# Altium PCB PCB1.PcbDoc (part 1 of 2)
Units mm, origin at the board's own origin, x right, y up, seen from the top; angles counter-clockwise.
Board outline 300 x 200 mm, 2 copper layers (Top Layer, Bottom Layer); 518 components, 359 nets, 1431 pads, 0 vias.
Unrouted connection lines stored in the file: 983.
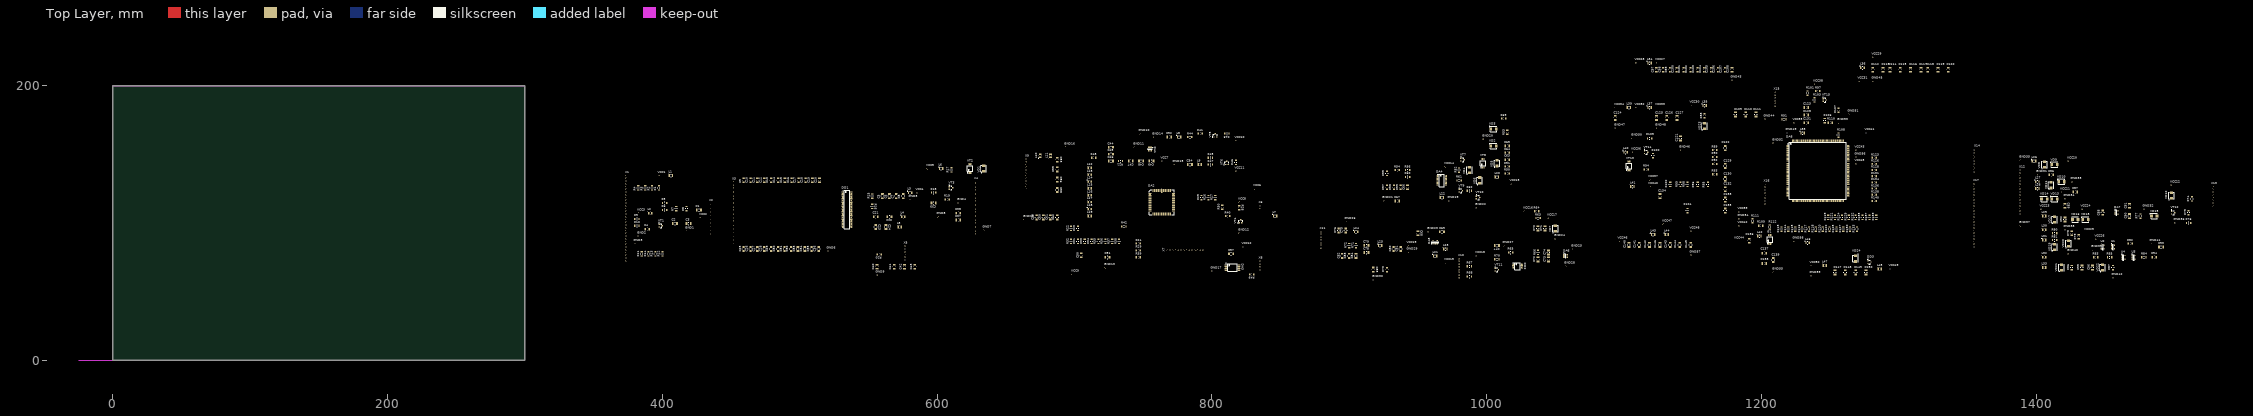
[diagram p0: Top Layer view]
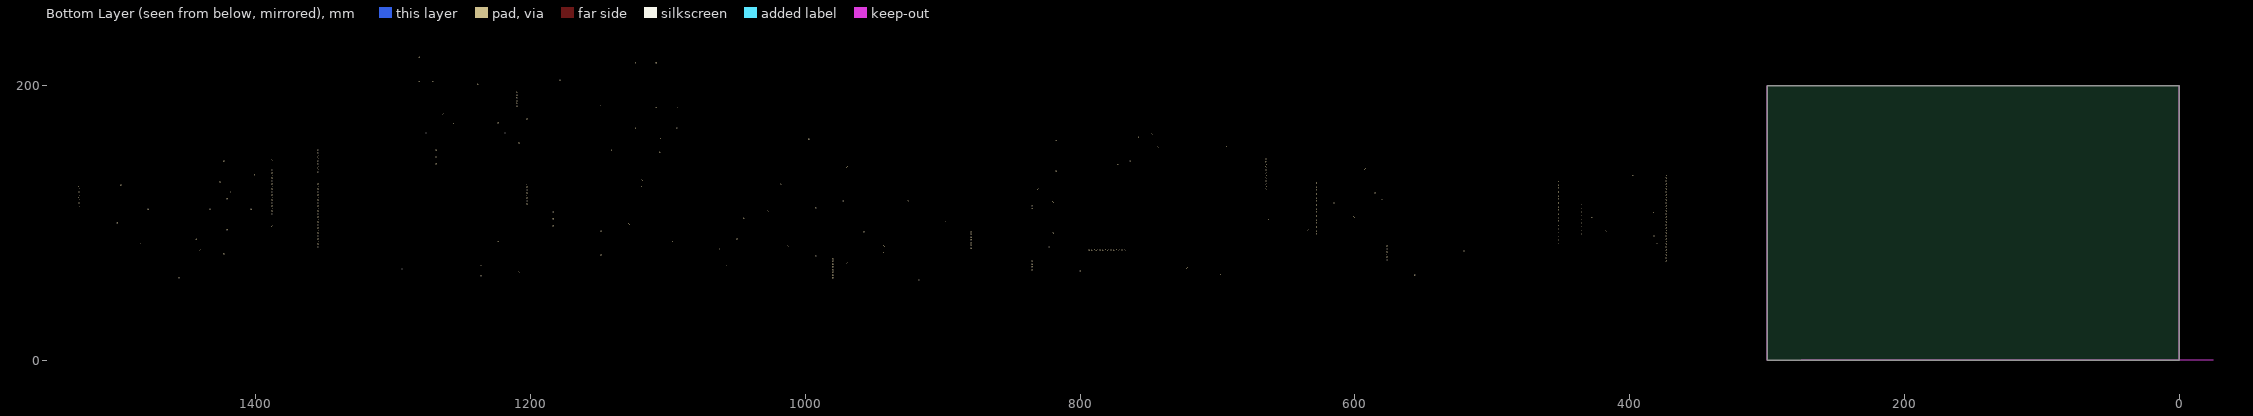
[diagram p1: Bottom Layer view, seen from below]

## Layer stack, top to bottom
Top Solder: solder mask 0.0102, Solder Resist, Dk 3.5
Top Layer: signal copper 0.0356
Dielectric 1: dielectric 0.32, FR-4, Dk 4.8
Bottom Layer: signal copper 0.0356
Bottom Solder: solder mask 0.0102, Solder Resist, Dk 3.5

## Board outline
0,0 300,0 300,200 0,200

## Design rules (kind name [scope] priority, off if disabled: settings)
Clearance [All] p1: gap=0.254 ignorepadtopadclearanceinfootprint=FALSE except(0: Arc-Hole Track-Hole SMDPad-Hole THPad-Hole Via-Hole Fill-Hole Poly-Hole Region-Hole Text-Hole)
PolygonConnect [All] p1: connectstyle=Relief reliefconductorwidth=0.254 reliefentries=4 polygonreliefangle="90 Angle" airgapwidth=0.254
RoomDefinition sch6 [InComponentClass('sch6')] p1: confinementstyle=ConfineIn formatcopy=TRUE lockcomponents=FALSE outline 1386,58 1533.5,58 1533.5,148 1386,148
RoomDefinition sch5_1 [InComponentClass('sch5_1')] p2: confinementstyle=ConfineIn formatcopy=TRUE lockcomponents=FALSE outline 1091.15,56.5 1361.15,56.5 1361.15,224 1091.15,224
RoomDefinition sch4 [InComponentClass('sch4')] p3: confinementstyle=ConfineIn formatcopy=TRUE lockcomponents=FALSE outline 877.5,56 1065,56 1065,181 877.5,181
RoomDefinition sch3 [InComponentClass('sch3')] p4: confinementstyle=ConfineIn formatcopy=TRUE lockcomponents=FALSE outline 661,57.5 851,57.5 851,182.5 661,182.5
RoomDefinition sch2 [InComponentClass('sch2')] p5: confinementstyle=ConfineIn formatcopy=TRUE lockcomponents=FALSE outline 447.8,59.55 640.3,59.55 640.3,157.55 447.8,157.55
RoomDefinition sch1 [InComponentClass('sch1')] p6: confinementstyle=ConfineIn formatcopy=TRUE lockcomponents=FALSE outline 371.25,70 437.5,70 437.5,140 371.25,140
RoutingVias [All] p1: holewidth=0.711 width=1.27 viastyle="Through Hole" minholewidth=0.711 minwidth=1.27 maxholewidth=0.711 maxwidth=1.27
SolderMaskExpansion [All] p1: expansion=0.102
Width [All] p1: maxlimit=0.254 minlimit=0.254 preferedwidth=0.254
30 further rules are at their usual default settings.

## Classes and differential pairs
component class sch1: C1 C2 C3 C4 GND1 GND2 GND3 L1 L2 R1 R2 R3 R4 R5 R6 R7 R8 R9 R10 R11 R12 R13 R14 VCC1 VCC2 VCC3 VT1 X1 X2
component class sch2: C5 C6 C7 C8 C9 C10 C11 C12 C13 C14 C15 C16 C17 C18 C19 C20 C21 C22 C23 C24 C25 C26 C27 C28 C29 C30 C31 C32 C33 C34 C35 C36 C37 C38 C39 C40 C41 C42 C43 DD1 GND4 GND5 GND6 GND7 GND8 GND9 L3 L4 L5 L6 R15 R16 R17 R18 R19 R20 VCC4 VCC5 VD1 VT2 VT3 X3 X4 X5
component class sch3: C44 C45 C46 C47 C48 C49 C50 C51 C52 C53 C54 C55 C56 C57 C58 C59 C60 C61 C62 DA1 DA2 DA3 GND10 GND11 GND12 GND13 GND14 GND15 GND16 GND17 GND18 L7 L8 L9 L10 L11 L12 L13 L14 L15 L16 L17 L18 L19 R21 R22 R23 R24 R25 R26 R27 R28 R29 R30 R31 R32 R33 R34 R35 R36 R37 R38 R39 R40 R41 R42 R43 R44 R45 R46 R47 R48 R49 VCC6 VCC7 VCC8 VCC9 VCC10 VCC11 VCC12 VT4 VT5 VT6 X6 X7 X8 X9
component class sch4: C63 C64 C65 C66 C67 C68 C69 C70 C71 C72 C73 C74 C75 C76 C77 C78 C79 C80 C81 C82 C83 C84 C85 DA4 DA5 DA6 DD2 GND19 GND20 GND21 GND22 GND23 GND24 GND25 GND26 GND27 GND28 GND29 GND30 L20 L21 L22 L23 L24 L25 R50 R51 R52 R53 R54 R55 R56 R57 R58 R59 R60 R61 R62 R63 R64 R65 R66 R67 R68 R69 R70 R71 R72 R73 VCC13 VCC14 VCC15 VCC16 VCC17 VCC18 VCC19 VD2 VD3 VD4 VD5 VD6 VD7 VT7 VT8 VT9 VT10 VT11 X10 X11
component class sch5_1: C97 C98 C99 C100 C101 C102 C103 C104 C105 C106 C107 C108 C109 C110 C111 C112 C113 C114 C115 C116 C117 C118 C119 C120 C121 C122 C123 C124 C125 C126 C127 C128 C129 C130 C131 C132 C133 C134 C135 C136 C137 C138 C139 C140 C141 C142 C143 C144 C145 C146 C147 C148 C149 C150 DA8 DD3 G1 GND43 GND44 GND45 GND46 GND47 GND48 GND49 GND50 GND51 GND52 GND53 GND54 GND55 GND56 GND57 GND58 GND59 L34 L35 L36 L37 L38 L39 L40 L41 L42 L43 L44 L45 L46 L47 R88 R89 R90 R91 R92 R93 R94 R95 R96 R97 R98 R99 R100 R101 R102 R103 R104 R105 R106 R107 R108 R109 R110 R111 R112 R113 R114 R115 R116 R117 R118 R119 R120 R121 R122 R123 R124 R125 R126 R127 R128 R129 R130 R131 R132 R133 R134 R135 R136 R137 R138 R139 R140 VCC27 VCC28 VCC29 VCC30 VCC31 VCC32 VCC33 VCC34 VCC35 VCC36 VCC37 VCC38 VCC39 VCC40 VCC41 VCC42 VCC43 VCC44 VCC45 VCC46 VCC47 VCC48 VCC49 VCC50 VD23 VD24 VT13 VT14 VT15 X14 X15 X16 X17
component class sch6: C86 C87 C88 C89 C90 C91 C92 C93 C94 C95 C96 DA7 GND31 GND32 GND33 GND34 GND35 GND36 GND37 GND38 GND39 GND40 GND41 GND42 L26 L27 L28 L29 L30 L31 L32 L33 R74 R75 R76 R77 R78 R79 R80 R81 R82 R83 R84 R85 R86 R87 U1 U2 U3 U4 VCC20 VCC21 VCC22 VCC23 VCC24 VCC25 VCC26 VD8 VD9 VD10 VD11 VD12 VD13 VD14 VD15 VD16 VD17 VD18 VD19 VD20 VD21 VD22 VT12 X12 X13

## Components (designator, comment, footprint, x,y, rotation, side; value= is the part's Value field where it differs from the comment)
C1 "*" "Capacitor 0805" 426.6,109.5 r0 top
C2 "*" "Capacitor 0805" 409.1,99.5 r0 top
C3 "*" "Capacitor 0805" 419.1,99.5 r0 top
C4 "*" "Capacitor 0805" 389,95.45 r0 top
C5 "*" "Capacitor 0805" 560.3,119.55 r90 top
C6 "*" "Capacitor 0805" 565.3,119.55 r90 top
C7 "*" "Capacitor 0805" 570.3,119.55 r90 top
C8 "*" "Capacitor 0805" 575.3,119.55 r90 top
C9 "*" "Capacitor 0805" 459.3,131.05 r90 top
C10 "*" "Capacitor 0805" 464.3,131.05 r90 top
C11 "*" "Capacitor 0805" 469.3,131.05 r90 top
C12 "*" "Capacitor 0805" 474.3,131.05 r90 top
C13 "*" "Capacitor 0805" 479.3,131.05 r90 top
C14 "*" "Capacitor 0805" 484.3,131.05 r90 top
C15 "*" "Capacitor 0805" 489.3,131.05 r90 top
C16 "*" "Capacitor 0805" 494.3,131.05 r90 top
C17 "*" "Capacitor 0805" 499.3,131.05 r90 top
C18 "*" "Capacitor 0805" 504.3,131.05 r90 top
C19 "*" "Capacitor 0805" 509.3,131.05 r90 top
C20 "*" "Capacitor 0805" 514.3,131.05 r90 top
C21 "*" "Capacitor 0805" 555.3,104.55 r0 top
C22 "*" "Capacitor 0805" 565.3,104.55 r180 top
C23 "*" "Capacitor 0805" 555.3,97.05 r270 top
C24 "*" "Capacitor 0805" 562.8,97.05 r270 top
C25 "*" "Capacitor 0805" 459.3,81.05 r90 top
C26 "*" "Capacitor 0805" 464.3,81.05 r90 top
C27 "*" "Capacitor 0805" 469.3,81.05 r90 top
C28 "*" "Capacitor 0805" 474.3,81.05 r90 top
C29 "*" "Capacitor 0805" 479.3,81.05 r90 top
C30 "*" "Capacitor 0805" 484.3,81.05 r90 top
C31 "*" "Capacitor 0805" 489.3,81.05 r90 top
C32 "*" "Capacitor 0805" 493.8,81.05 r90 top
C33 "*" "Capacitor 0805" 498.8,81.05 r90 top
C34 "*" "Capacitor 0805" 503.8,81.05 r90 top
C35 "*" "Capacitor 0805" 508.8,81.05 r90 top
C36 "*" "Capacitor 0805" 513.8,81.05 r90 top
C37 "*" "Capacitor 0805" 615.427,102.05 r0 top
C38 "*" "Capacitor 0805" 615.427,107.05 r0 top
C39 "*" "Capacitor 0805" 597.427,114.55 r180 top
C40 "*" "Capacitor 0805" 556.3,68.05 r90 top
C41 "*" "Capacitor 0805" 568.8,68.05 r90 top
C42 "*" "Capacitor 0805" 576.3,68.05 r90 top
C43 "*" "Capacitor 0805" 583.8,68.05 r90 top
C44 "*" "Capacitor 0805" 726.5,155 r0 top
C45 "*" "Capacitor 0805" 726.5,150 r0 top
C46 "*" "Capacitor 0805" 726.5,145 r0 top
C47 "*" "Capacitor 0805" 741,145 r180 top
C48 "*" "Capacitor 0805" 748.5,145 r180 top
C49 "*" "Capacitor 0805" 756,145 r180 top
C50 "*" "Capacitor 0805" 705,76.5 r90 top
C51 "*" "Capacitor 0805" 724,75 r0 top
C52 "*" "Capacitor 0805" 769,162.5 r0 top
C53 "*" "Capacitor 0805" 687.5,146 r270 top
C54 "*" "Capacitor 0805" 784,142.5 r0 top
C55 "*" "Capacitor 0805" 687.5,139 r90 top
C56 "*" "Capacitor 0805" 687.5,131.5 r270 top
C57 "*" "Capacitor 0805" 814,77.5 r0 top
C58 "*" "Capacitor 0805" 687.5,124 r270 top
C59 "*" "Capacitor 0805" 672.5,104 r90 top
C60 "*" "Capacitor 0805" 677.5,104 r90 top
C61 "*" "Capacitor 0805" 682.5,104 r90 top
C62 "*" "Capacitor 0805" 687.5,104 r90 top
C63 "*" "Capacitor 0805" 1015,146 r0 top
C64 "*" "Capacitor 0805" 1015,151 r0 top
C65 "*" "Capacitor 0805" 1015,156 r0 top
C66 "*" "Capacitor 0805" 942.5,126 r90 top
C67 "*" "Capacitor 0805" 935,116 r0 top
C68 "*" "Capacitor 0805" 950,92.5 r270 top
C69 "*" "Capacitor 0805" 967.5,93.5 r0 top
C70 "*" "Capacitor 0805" 1037.5,96 r90 top
C71 "*" "Capacitor 0805" 1042.5,96 r90 top
C72 "*" "Capacitor 0805" 1037.5,73.5 r90 top
C73 "*" "Capacitor 0805" 1045,73.5 r90 top
C74 "*" "Capacitor 0805" 1045,78.5 r90 top
C75 "*" "Capacitor 0805" 897.5,94.5 r90 top (schematic designator C76)
C76 "*" "Capacitor 0805" 892.5,94.5 r90 top (schematic designator C77)
C77 "*" "Capacitor 0805" 1007.5,83.5 r180 top (schematic designator C75)
C78 "*" "Capacitor 0805" 912.5,78.5 r0 top
C79 "*" "Capacitor 0805" 912.5,83.5 r0 top
C80 "*" "Capacitor 0805" 932.5,81 r90 top
C81 "*" "Capacitor 0805" 937.5,81 r90 top
C82 "*" "Capacitor 0805" 895,76 r90 top
C83 "*" "Capacitor 0805" 900,76 r90 top
C84 "*" "Capacitor 0805" 905,76 r90 top
C85 "*" "Capacitor 0805" 917.5,66 r270 top
C86 "*" "Capacitor 0805" 1411,135 r0 top
C87 "*" "Capacitor 0805" 1428.5,122.5 r0 top
C88 "*" "Capacitor 0805" 1448.5,107.5 r90 top
C89 "*" "Capacitor 0805" 1421,112.5 r270 top
C90 "*" "Capacitor 0805" 1468,105 r90 top
C91 "*" "Capacitor 0805" 1468,112.5 r90 top
C92 "*" "Capacitor 0805" 1421,102.5 r90 top
C93 "*" "Capacitor 0805" 1491,82.5 r0 top
C94 "*" "Capacitor 0805" 1486,75 r0 top
C95 "*" "Capacitor 0805" 1433.5,67.5 r90 top
C96 "*" "Capacitor 0805" 1441,67.5 r90 top
C97 "*" "Capacitor 0805" 1123.65,211.5 r90 top
C98 "*" "Capacitor 0805" 1128.65,211.5 r90 top
C99 "*" "Capacitor 0805" 1133.65,211.5 r90 top
C100 "*" "Capacitor 0805" 1138.65,211.5 r90 top
C101 "*" "Capacitor 0805" 1143.65,211.5 r90 top
C102 "*" "Capacitor 0805" 1148.65,211.5 r90 top
C103 "*" "Capacitor 0805" 1153.65,211.5 r90 top
C104 "*" "Capacitor 0805" 1158.65,211.5 r90 top
C105 "*" "Capacitor 0805" 1163.65,211.5 r90 top
C106 "*" "Capacitor 0805" 1168.65,211.5 r90 top
C107 "*" "Capacitor 0805" 1173.65,211.5 r90 top
C108 "*" "Capacitor 0805" 1178.65,211.5 r90 top
C109 "*" "Capacitor 0805" 1181.15,179 r90 top
C110 "*" "Capacitor 0805" 1188.65,179 r90 top
C111 "*" "Capacitor 0805" 1196.15,179 r90 top
C112 "*" "Capacitor 0805" 1281.15,211.5 r90 top
C113 "*" "Capacitor 0805" 1288.65,211.5 r90 top
C114 "*" "Capacitor 0805" 1293.65,211.5 r90 top
C115 "*" "Capacitor 0805" 1301.15,211.5 r90 top
C116 "*" "Capacitor 0805" 1308.65,211.5 r90 top
C117 "*" "Capacitor 0805" 1316.15,211.5 r90 top
C118 "*" "Capacitor 0805" 1321.15,211.5 r90 top
C119 "*" "Capacitor 0805" 1328.65,211.5 r90 top
C120 "*" "Capacitor 0805" 1336.15,211.5 r90 top
C121 "*" "Capacitor 0805" 1141.15,161.5 r270 top
C122 "*" "Capacitor 0805" 1173.65,154.5 r270 top
C123 "*" "Capacitor 0805" 1232.65,184 r180 top
C124 "*" "Capacitor 0805" 1093.65,176.5 r90 top
C125 "*" "Capacitor 0805" 1123.65,176.5 r90 top
C126 "*" "Capacitor 0805" 1131.15,176.5 r90 top
C127 "*" "Capacitor 0805" 1138.65,176.5 r90 top
C128 "*" "Capacitor 0805" 1232.65,178.5 r0 top
C129 "*" "Capacitor 0805" 1173.65,141.5 r90 top
C130 "*" "Capacitor 0805" 1173.65,132 r90 top
C131 "*" "Capacitor 0805" 1232.65,173 r0 top
C132 "*" "Capacitor 0805" 1173.65,124.5 r90 top
C133 "*" "Capacitor 0805" 1173.65,117 r90 top
C134 "*" "Capacitor 0805" 1126.15,119.5 r90 top
C135 "*" "Capacitor 0805" 1173.65,109 r270 top
C136 "*" "Capacitor 0805" 1191.15,87 r270 top
C137 "*" "Capacitor 0805" 1202.15,78 r180 top
C138 "*" "Capacitor 0805" 1202.15,70.5 r180 top
C139 "*" "Capacitor 0805" 1208.65,73 r90 top
C140 "*" "Capacitor 0805" 1103.65,84 r90 top
C141 "*" "Capacitor 0805" 1111.15,84 r90 top
C142 "*" "Capacitor 0805" 1118.65,84 r90 top
C143 "*" "Capacitor 0805" 1133.65,84 r90 top
C144 "*" "Capacitor 0805" 1140.65,84 r90 top
C145 "*" "Capacitor 0805" 1148.65,84 r90 top
C146 "*" "Capacitor 0805" 1126.15,84 r90 top
C147 "*" "Capacitor 0805" 1253.65,64 r90 top
C148 "*" "Capacitor 0805" 1261.15,64 r90 top
C149 "*" "Capacitor 0805" 1268.65,64 r90 top
C150 "*" "Capacitor 0805" 1276.15,64 r90 top
DA1 "*" IC103 755,153.8 r270 top
DA2 "*" NT68 763.5,115 r0 top
DA3 "*" IC102 815,67.5 r0 top
DA4 "*" AP494A 967.5,131 r0 top
DA5 "*" PQ05 962.5,86 r90 top
DA6 "*" IC103 1057.5,76 r0 top
DA7 "*" MIC5205 1458.5,107.5 r0 top
DA8 "*" QFP95P4500X4500X245-160N 1241.15,138 r0 top
DD1 "*" THC63 534.4,109.675 r0 top
DD2 "*" "D FF" 1022.5,68.5 r0 top
DD3 "*" MIC39 1278.65,71.5 r0 top
G1 "*" GENERATOR-25MHZ 1206.15,88 r90 top
GND1 "GND" "ONE PIN" 417.5,93.95 r90 top
GND2 "GND" "ONE PIN" 382.5,90.45 r90 top
GND3 "GND" "ONE PIN" 380.1,85 r90 top
GND4 "GND" "ONE PIN" 615.427,114.55 r90 top
GND5 "GND" "ONE PIN" 580.3,117.05 r90 top
GND6 "GND" "ONE PIN" 520.3,79.55 r90 top
GND7 "GND" "ONE PIN" 633.927,94.55 r90 top
GND8 "GND" "ONE PIN" 600.427,104.55 r90 top
GND9 "GND" "ONE PIN" 556.3,62.05 r90 top
GND10 "GND" "ONE PIN" 747.5,165 r90 top
GND11 "GND" "ONE PIN" 743.5,155 r90 top
GND12 "GND" "ONE PIN" 820,92.5 r90 top
GND13 "GND" "ONE PIN" 722.5,67.5 r90 top
GND14 "GND" "ONE PIN" 757.5,162.5 r90 top
GND15 "GND" "ONE PIN" 772.5,142.5 r90 top
GND16 "GND" "ONE PIN" 693.5,155 r90 top
GND17 "GND" "ONE PIN" 800,65 r90 top
GND18 "GND" "ONE PIN" 663.5,102.5 r90 top
GND19 "GND" "ONE PIN" 972.5,116 r90 top
GND20 "GND" "ONE PIN" 997.5,161 r90 top
GND21 "GND" "ONE PIN" 925,116 r90 top
GND22 "GND" "ONE PIN" 992.5,111 r90 top
GND23 "GND" "ONE PIN" 957.5,93.5 r90 top
GND24 "GND" "ONE PIN" 1050,88.5 r90 top
GND25 "GND" "ONE PIN" 1062.5,81 r90 top
GND26 "GND" "ONE PIN" 897.5,101 r90 top
GND27 "GND" "ONE PIN" 1012.5,83.5 r90 top
GND28 "GND" "ONE PIN" 1057.5,68.5 r90 top
GND29 "GND" "ONE PIN" 942.5,78.5 r90 top
GND30 "GND" "ONE PIN" 917.5,58.5 r90 top
GND31 "AGND" "ONE PIN" 1401,135 r90 top
GND32 "GND" "ONE PIN" 1478.5,110 r90 top
GND33 "AGND" "ONE PIN" 1426,130 r90 top
GND34 "AGND" "ONE PIN" 1421,117.5 r90 top
GND35 "AGND" "ONE PIN" 1388.5,145.5 r90 top
GND36 "GND" "ONE PIN" 1501,100 r90 top
GND37 "GND" "ONE PIN" 1388.5,98 r90 top
GND38 "AGND" "ONE PIN" 1421,95 r90 top
GND39 "AGND" "ONE PIN" 1441,80.5 r90 top
GND40 "GND" "ONE PIN" 1423.5,77.5 r90 top
GND41 "AGND" "ONE PIN" 1483.5,85 r90 top
GND42 "AGND" "ONE PIN" 1456,60 r90 top
GND43 "GND" "ONE PIN" 1178.65,204 r90 top
GND44 "AGND" "ONE PIN" 1202.5,175.5 r90 top
GND45 "GND" "ONE PIN" 1281.15,203 r90 top
GND46 "GND" "ONE PIN" 1141.15,153 r90 top
GND47 "GND" "ONE PIN" 1093.65,169 r90 top
GND48 "GND" "ONE PIN" 1123.65,169 r90 top
GND49 "AGND" "ONE PIN" 1218.65,165.5 r90 top
GND50 "GND" "ONE PIN" 1106.15,161.5 r90 top
GND51 "GND" "ONE PIN" 1263.65,179 r90 top
GND52 "GND" "ONE PIN" 1208.65,158 r90 top
GND53 "GND" "ONE PIN" 1256.15,173 r90 top
GND54 "GND" "ONE PIN" 1183.65,103 r90 top
GND55 "GND" "ONE PIN" 1208.65,64 r90 top
GND56 "AGND" "ONE PIN" 1268.65,148 r90 top
GND57 "AGND" "ONE PIN" 1148.65,76.5 r90 top
GND58 "GND" "ONE PIN" 1223.65,86.5 r90 top
GND59 "GND" "ONE PIN" 1236.15,61.5 r90 top
L1 "*" "Inductor 2520" 406.25,134.5 r0 top
L2 "*" "Inductor 2520" 391.25,107 r0 top
L3 "*" "Inductor 2520" 580.3,122.05 r0 top
L4 "*" "Inductor 2520" 575.3,104.55 r0 top
L5 "*" "Inductor 2520" 572.8,97.05 r0 top
L6 "*" "Inductor 2520" 602.927,139.55 r0 top
L7 "*" "Inductor 2520" 846,105 r0 top
L8 "*" "Inductor 2520" 776.15,162.5 r0 top
L9 "*" "Inductor 2520" 791.15,142.5 r0 top
L10 "*" "Inductor 2520" 675,148.85 r90 top
L11 "*" "Inductor 2520" 682.5,148.85 r90 top
L12 "*" "Inductor 2520" 711.15,140 r0 top
L13 "*" "Inductor 2520" 711.15,135 r0 top
L14 "*" "Inductor 2520" 711.15,130 r0 top
L15 "*" "Inductor 2520" 711.15,125 r0 top
L16 "*" "Inductor 2520" 711.15,120 r0 top
L17 "*" "Inductor 2520" 711.15,115 r0 top
L18 "*" "Inductor 2520" 711.15,110 r0 top
L19 "*" "Inductor 2520" 711.15,105 r0 top
L20 "*" "Inductor 2520" 1007.5,133.5 r0 top
L21 "*" "Inductor 2520" 962.5,76 r0 top
L22 "*" "Inductor 2520" 967.5,118.5 r0 top
L23 "*" "Inductor 2520" 970,81 r0 top
L24 "*" "Inductor 2520" 905,93.5 r0 top
L25 "*" "Inductor 2520" 922.5,83.5 r0 top
L26 "*" "Inductor 2520" 1398.5,145 r0 top
L27 "*" "Inductor 2520" 1401,130 r0 top
L28 "*" "Inductor 2520" 1401,125 r0 top
L29 "*" "Inductor 2520" 1406,105 r0 top
L30 "*" "Inductor 2520" 1406,95 r0 top
L31 "*" "Inductor 2520" 1406,87.5 r0 top
L32 "*" "Inductor 2520" 1406,75 r0 top
L33 "*" "Inductor 2520" 1406,67.5 r0 top
L34 "*" "Inductor 2520" 1118.65,216.5 r0 top
L35 "*" "Inductor 2520" 1158.65,185.5 r0 top
L36 "*" "Inductor 2520" 1273.65,213 r0 top
L37 "*" "Inductor 2520" 1118.65,184 r0 top
L38 "*" "Inductor 2520" 1230,165.5 r0 top
L39 "*" "Inductor 2520" 1103.65,184 r0 top
L40 "*" "Inductor 2520" 1101.15,151.5 r0 top
L41 "*" "Inductor 2520" 1106.15,126.5 r0 top
L42 "*" "Inductor 2520" 1198.65,90.5 r0 top
L43 "*" "Inductor 2520" 1121.15,91.5 r0 top
L44 "*" "Inductor 2520" 1131.15,91.5 r0 top
L45 "*" "Inductor 2520" 1286.15,66.5 r0 top
L46 "*" "Inductor 2520" 1233.65,85.5 r0 top
L47 "*" "Inductor 2520" 1246.15,69 r0 top
R1 "*" "Resistor 1206" 397.5,125.45 r90 top
R2 "*" "Resistor 1206" 392.5,125.45 r90 top
R3 "*" "Resistor 1206" 387.5,125.45 r90 top
R4 "*" "Resistor 1206" 382.5,125.45 r90 top
R5 "*" "Resistor 1206" 401.6,114.5 r0 top
R6 "*" "Resistor 1206" 401.6,109.5 r0 top
R7 "*" "Resistor 1206" 410.1,110.5 r90 top
R8 "*" "Resistor 1206" 417.6,110.5 r90 top
R9 "*" "Resistor 1206" 381.5,102.95 r0 top
R10 "*" "Resistor 1206" 381.5,97.95 r0 top
R11 "*" "Resistor 1206" 385,77.45 r90 top
R12 "*" "Resistor 1206" 400,77.45 r90 top
R13 "*" "Resistor 1206" 395,77.45 r90 top
R14 "*" "Resistor 1206" 390,77.45 r90 top
R15 "*" "Resistor 1206" 552.8,119.55 r90 top
R16 "*" "Resistor 1206" 552.8,112.05 r270 top
R17 "*" "Resistor 1206" 610.427,138.55 r90 top
R18 "*" "Resistor 1206" 597.427,122.05 r0 top
R19 "*" "Resistor 1206" 607.427,117.05 r0 top
R20 "*" "Resistor 1206" 557.8,77.05 r180 top
R21 "*" "Resistor 1206" 733.5,145 r180 top
R22 "*" "Resistor 1206" 697.5,96 r90 top
R23 "*" "Resistor 1206" 702.5,96 r90 top
R24 "*" "Resistor 1206" 746.5,85 r0 top
R25 "*" "Resistor 1206" 792.5,118.5 r90 top
R26 "*" "Resistor 1206" 797.5,118.5 r90 top
R27 "*" "Resistor 1206" 802.5,118.5 r90 top
R28 "*" "Resistor 1206" 820,111 r270 top
R29 "*" "Resistor 1206" 746.5,80 r0 top
R30 "*" "Resistor 1206" 807.5,111.5 r90 top
R31 "*" "Resistor 1206" 702.5,86.5 r90 top
R32 "*" "Resistor 1206" 697.5,86.5 r90 top
R33 "*" "Resistor 1206" 707.5,86.5 r90 top
R34 "*" "Resistor 1206" 712.5,86.5 r90 top
R35 "*" "Resistor 1206" 717.5,86.5 r90 top
R36 "*" "Resistor 1206" 722.5,86.5 r90 top
R37 "*" "Resistor 1206" 727.5,86.5 r90 top
R38 "*" "Resistor 1206" 732.5,86.5 r90 top
R39 "*" "Resistor 1206" 746.5,75 r0 top
R40 "*" "Resistor 1206" 811.5,105 r0 top
R41 "*" "Resistor 1206" 791.5,165 r0 top
R42 "*" "Resistor 1206" 736,97.5 r0 top
R43 "*" "Resistor 1206" 811,165 r180 top
R44 "*" "Resistor 1206" 784,162.5 r0 top
R45 "*" "Resistor 1206" 799,147.5 r0 top
R46 "*" "Resistor 1206" 817.5,144 r90 top
R47 "*" "Resistor 1206" 799,142.5 r0 top
R48 "*" "Resistor 1206" 714,147.5 r0 top
R49 "*" "Resistor 1206" 829,62.5 r180 top
R50 "*" "Resistor 1206" 1015,136 r0 top
R51 "*" "Resistor 1206" 1015,141 r0 top
R52 "*" "Resistor 1206" 980,138.5 r90 top
R53 "*" "Resistor 1206" 1015,166 r90 top
R54 "*" "Resistor 1206" 935,138.5 r0 top
R55 "*" "Resistor 1206" 927.5,136 r90 top
R56 "*" "Resistor 1206" 942.5,138.5 r0 top
R57 "*" "Resistor 1206" 927.5,126 r90 top
R58 "*" "Resistor 1206" 932.5,126 r90 top
R59 "*" "Resistor 1206" 937.5,126 r90 top
R60 "*" "Resistor 1206" 942.5,133.5 r0 top
R61 "*" "Resistor 1206" 980,131 r0 top
R62 "*" "Resistor 1206" 987.5,123.5 r0 top
R63 "*" "Resistor 1206" 1037.5,103.5 r0 top
R64 "*" "Resistor 1206" 1036.5,108.5 r0 top
R65 "*" "Resistor 1206" 1017.5,78.5 r0 top
R66 "*" "Resistor 1206" 1037.5,78.5 r90 top
R67 "*" "Resistor 1206" 987.5,68.5 r0 top
R68 "*" "Resistor 1206" 987.5,61 r0 top
R69 "*" "Resistor 1206" 1012.5,176 r0 top
R70 "*" "Resistor 1206" 1007.5,73.5 r0 top
R71 "*" "Resistor 1206" 905,83.5 r90 top
R72 "*" "Resistor 1206" 900,83.5 r90 top
R73 "*" "Resistor 1206" 927.5,66 r90 top
R74 "*" "Resistor 1206" 1513.5,117.5 r90 top
R75 "*" "Resistor 1206" 1511,107.5 r90 top
R76 "*" "Resistor 1206" 1511,100 r0 top
R77 "*" "Resistor 1206" 1476,105 r90 top
R78 "*" "Resistor 1206" 1426,92.5 r90 top
R79 "*" "Resistor 1206" 1431,90 r90 top
R80 "*" "Resistor 1206" 1413.5,92.5 r0 top
R81 "*" "Resistor 1206" 1413.5,87.5 r0 top
R82 "*" "Resistor 1206" 1468.5,85 r0 top
R83 "*" "Resistor 1206" 1443.5,75 r0 top
R84 "*" "Resistor 1206" 1478.5,75 r0 top
R85 "*" "Resistor 1206" 1453.5,75 r0 top
R86 "*" "Resistor 1206" 1426,67.5 r90 top
R87 "*" "Resistor 1206" 1456,67.5 r90 top
R88 "*" "Resistor 1206" 1158.65,178 r90 top
R89 "*" "Resistor 1206" 1166.15,153 r0 top
R90 "*" "Resistor 1206" 1166.15,148 r0 top
R91 "*" "Resistor 1206" 1216.5,175.5 r0 top
R92 "*" "Resistor 1206" 1166.15,143 r0 top
R93 "*" "Resistor 1206" 1166.15,135.5 r0 top
R94 "*" "Resistor 1206" 1116.15,139 r0 top
R95 "*" "Resistor 1206" 1161.15,128 r270 top
R96 "*" "Resistor 1206" 1153.65,128 r270 top
R97 "*" "Resistor 1206" 1241.15,196 r180 top
R98 "*" "Resistor 1206" 1146.15,128 r90 top
R99 "*" "Resistor 1206" 1141.15,128 r90 top
R100 "*" "Resistor 1206" 1121.15,149 r90 top
R101 "*" "Resistor 1206" 1233.65,194.5 r90 top
R102 "*" "Resistor 1206" 1133.65,128 r90 top
R103 "*" "Resistor 1206" 1238.65,189.5 r90 top
R104 "*" "Resistor 1206" 1146.15,109 r270 top
R105 "*" "Resistor 1206" 1118.65,161.5 r0 top
R106 "*" "Resistor 1206" 1246.15,174.5 r90 top
R107 "*" "Resistor 1206" 1256.15,182 r90 top
R108 "*" "Resistor 1206" 1256.15,164 r90 top
R109 "*" "Resistor 1206" 1199.65,98 r0 top
R110 "*" "Resistor 1206" 1250.15,173 r180 top
R111 "*" "Resistor 1206" 1193.65,101.5 r90 top
R112 "*" "Resistor 1206" 1206.15,97 r90 top
R113 "*" "Resistor 1206" 1214.65,95.5 r90 top
R114 "*" "Resistor 1206" 1219.65,95.5 r90 top
R115 "*" "Resistor 1206" 1224.65,95.5 r90 top
R116 "*" "Resistor 1206" 1229.65,95.5 r90 top
R117 "*" "Resistor 1206" 1234.65,95.5 r90 top
R118 "*" "Resistor 1206" 1239.65,95.5 r90 top
R119 "*" "Resistor 1206" 1248.65,104 r90 top
R120 "*" "Resistor 1206" 1244.65,95.5 r90 top
R121 "*" "Resistor 1206" 1253.65,104 r90 top
R122 "*" "Resistor 1206" 1249.65,95.5 r90 top
R123 "*" "Resistor 1206" 1282.15,147.5 r0 top
R124 "*" "Resistor 1206" 1258.65,104 r90 top
R125 "*" "Resistor 1206" 1254.65,95.5 r90 top
R126 "*" "Resistor 1206" 1282.15,143 r0 top
R127 "*" "Resistor 1206" 1259.65,95.5 r90 top (schematic designator R128)
R128 "*" "Resistor 1206" 1282.15,138.5 r0 top (schematic designator R129)
R129 "*" "Resistor 1206" 1263.65,104 r90 top (schematic designator R127)
R130 "*" "Resistor 1206" 1264.65,95.5 r90 top (schematic designator R131)
R131 "*" "Resistor 1206" 1282.15,134 r0 top (schematic designator R132)
R132 "*" "Resistor 1206" 1268.65,104 r90 top (schematic designator R130)
R133 "*" "Resistor 1206" 1269.65,95.5 r90 top (schematic designator R134)
R134 "*" "Resistor 1206" 1282.15,129.5 r0 top (schematic designator R135)
R135 "*" "Resistor 1206" 1273.65,104 r90 top (schematic designator R133)
R136 "*" "Resistor 1206" 1282.15,125 r0 top (schematic designator R137)
R137 "*" "Resistor 1206" 1278.65,104 r90 top (schematic designator R136)
R138 "*" "Resistor 1206" 1282.15,120.5 r0 top (schematic designator R139)
R139 "*" "Resistor 1206" 1283.65,104 r90 top (schematic designator R138)
R140 "*" "Resistor 1206" 1282.15,116 r0 top
U1 "*" MIC5205 1456,82.5 r0 top
U2 "*" MIC5205 1448.5,82.5 r0 top
U3 "*" MIC5205 1471,75 r0 top
U4 "*" MIC5205 1463.5,75 r0 top
VCC1 "3V" "ONE PIN" 397.6,134.5 r90 top
VCC2 "5V" "ONE PIN" 427.5,103.95 r90 top
VCC3 "3V" "ONE PIN" 382.6,107 r90 top
VCC4 "3V" "ONE PIN" 585.3,122.05 r90 top
VCC5 "3V" "ONE PIN" 592.927,139.55 r90 top
VCC6 "5V" "ONE PIN" 831,125 r90 top
VCC7 "5V" "ONE PIN" 763.5,145 r90 top
VCC8 "3V" "ONE PIN" 820,115 r90 top
VCC9 "5V" "ONE PIN" 698.5,62.5 r90 top
VCC10 "3V" "ONE PIN" 817.5,160 r90 top
VCC11 "3V" "ONE PIN" 817.5,137.5 r90 top
VCC12 "3V" "ONE PIN" 822.5,82.5 r90 top
VCC13 "3V" "ONE PIN" 1017.5,128.5 r90 top
VCC14 "12V" "ONE PIN" 970,141 r90 top
VCC15 "5V" "ONE PIN" 970,71 r90 top
VCC16 "5V" "ONE PIN" 1027.5,108.5 r90 top
VCC17 "12V" "ONE PIN" 1045,103.5 r90 top
VCC18 "5V" "ONE PIN" 992.5,76 r90 top
VCC19 "12V" "ONE PIN" 942.5,83.5 r90 top
VCC20 "5V" "ONE PIN" 1423.5,145 r90 top
VCC21 "5V" "ONE PIN" 1418.5,122.5 r90 top
VCC22 "3V" "ONE PIN" 1498.5,127.5 r90 top
VCC23 "5V" "ONE PIN" 1403.5,110 r90 top
VCC24 "5V" "ONE PIN" 1433.5,110 r90 top
VCC25 "3V" "ONE PIN" 1436,93 r90 top
VCC26 "3V" "ONE PIN" 1443.5,88 r90 top
VCC27 "3V" "ONE PIN" 1123.65,216.5 r90 top (schematic designator VCC1)
VCC28 "3V" "ONE PIN" 1108.65,216.5 r90 top
VCC29 "2V" "ONE PIN" 1281.15,220.5 r90 top
VCC30 "3V" "ONE PIN" 1148.65,185.5 r90 top
VCC31 "2V" "ONE PIN" 1271.15,203 r90 top
VCC32 "3V" "ONE PIN" 1108.65,184 r90 top
VCC33 "3V" "ONE PIN" 1123.65,184 r90 top
VCC34 "3V" "ONE PIN" 1093.65,184 r90 top
VCC35 "2V" "ONE PIN" 1223.65,173 r90 top
VCC36 "2V" "ONE PIN" 1106.15,151.5 r90 top
VCC37 "3V" "ONE PIN" 1118.65,131.5 r90 top
VCC38 "3V" "ONE PIN" 1238.65,201 r90 top
VCC39 "2V" "ONE PIN" 1183.65,108 r90 top
VCC40 "2V" "ONE PIN" 1118.65,126.5 r90 top
VCC41 "3V" "ONE PIN" 1276.15,165.5 r90 top
VCC42 "3V" "ONE PIN" 1183.65,98 r90 top
VCC43 "3V" "ONE PIN" 1268.65,153 r90 top
VCC44 "3V" "ONE PIN" 1181.15,86.5 r90 top
VCC45 "2V" "ONE PIN" 1268.65,143 r90 top
VCC46 "5V" "ONE PIN" 1096.15,86.5 r90 top
VCC47 "5V" "ONE PIN" 1128.65,99 r90 top
VCC48 "5V" "ONE PIN" 1148.65,94 r90 top
VCC49 "2V" "ONE PIN" 1293.65,66.5 r90 top
VCC50 "3V" "ONE PIN" 1236.15,69 r90 top
VD1 "Diode 1" Diode 633.927,139.55 r90 top
VD2 "*" Diode 1005,156 r0 top
VD3 "*" Diode 1005,168.5 r0 top
VD4 "*" Diode 987.5,138.5 r90 top (schematic designator VD5)
VD5 "Diode 1" Diode 1007.5,143.5 r90 top (schematic designator VD4)
VD6 "*" Diode 995,131 r90 top
VD7 "*" Diode 1050,96 r90 top
VD8 "*" Diode 1406,142.5 r90 top
VD9 "*" Diode 1413.5,142.5 r0 top
VD10 "*" Diode 1418.5,130 r0 top
VD11 "*" Diode 1411,127.5 r90 top
VD12 "*" Diode 1498.5,120 r90 top
VD13 "*" Diode 1413.5,117.5 r0 top
VD14 "*" Diode 1406,117.5 r0 top
VD15 "*" Diode 1486,105 r0 top
VD16 "*" Diode 1428.5,102.5 r0 top
VD17 "*" Diode 1413.5,102.5 r90 top
VD18 "*" Diode 1436,102.5 r0 top
VD19 "*" Diode 1413.5,82.5 r90 top
VD20 "*" Diode 1423.5,85 r90 top
VD21 "*" Diode 1418.5,67.5 r90 top
VD22 "*" Diode 1448.5,67.5 r90 top
VD23 "*" Diode 1158.65,170.5 r90 top
VD24 "*" Diode 1268.65,74 r270 top
VT1 "*" "Transistor 1" 398.8,97.95 r0 top
VT2 "MOP TRANSISTOR" TR 623.927,139.55 r90 top
VT3 "*" "Transistor 1" 610.127,125.5 r0 top
VT4 "*" "Transistor 1" 820.95,101.2 r90 top
VT5 "*" "Transistor 1" 802.5,163.8 r90 top
VT6 "*" "Transistor 1" 810.95,143.7 r90 top
VT7 "*" "Transistor 1" 982.5,146 r0 top
VT8 "MOP TRANSISTOR" TR 997.5,143.5 r90 top
VT9 "*" "Transistor 1" 981.3,123.5 r0 top
VT10 "*" "Transistor 1" 993.8,118.5 r0 top
VT11 "*" "Transistor 1" 1007.5,66 r0 top
VT12 "*" "Transistor 1" 1499.8,107.5 r0 top
VT13 "MOP TRANSISTOR" TR 1103.65,141.5 r90 top
VT14 "*" "Transistor 1" 1116.15,151.5 r0 top
VT15 "*" "Transistor 1" 1246.15,189.5 r0 top
X1 "*" "DVI Connector" 373.75,134.5 r0 top
X2 "*" "All pins" 435,113.95 r0 top
X3 "*" BUSES 451.8,129.55 r0 top
X4 "*" DF14A 627.927,92.05 r0 top (schematic designator X2)
X5 "*" Inputs#1 576.427,83.05 r0 top
X6 "*" Inputs#2 835,112.5 r0 top
X7 "*" Outputs#1 767.5,80 r90 top
X8 "*" J102 835,72 r0 top
X9 "*" J101 665,146.5 r0 top (schematic designator X4)
X10 "*" Connector 980,74 r0 top
X11 "*" J601 879.4,81.675 r0 top (schematic designator X5)
X12 "*" "VGA Connector" 1388.5,134.5 r0 top (schematic designator X6)
X13 "*" Outputs#2 1528.5,126.5 r0 top
X14 "*" "Outputs 1" 1355,137 r180 top
X15 "*" "Inputs 1" 1210,195 r0 top
X16 "*" "Inputs 2" 1202.5,128 r0 top
X17 "*" NBuses 1355,128.5 r0 top

## Footprints (in the part's own frame and the unit in brackets; to place one, negate y for a bottom-side part, rotate by r counter-clockwise, add the part's x,y. Pads: shape width x height; smd on the part's side, far side on the other; paste and mask are expansions set on the pad)
"All pins" [mm]
  round 1 hole 0.75: 1(0,0) 2(0,-2) 3(0,-4) 4(0,-6) 5(0,-8) 6(0,-10) 7(0,-12) 8(0,-14) 9(0,-16) 10(0,-18) 11(0,-20) 12(0,-22)
AP494A [mm]
  oval 1.5x0.8 smd: 1(-3.1,3.325) 2(-3.1,2.375) 3(-3.1,1.425) 4(-3.1,0.475) 5(-3.1,-0.475) 6(-3.1,-1.425) 7(-3.1,-2.375) 8(-3.1,-3.325) 9(3.1,-3.325) 10(3.1,-2.375) 11(3.1,-1.425) 12(3.1,-0.475) 13(3.1,0.475) 14(3.1,1.425) 15(3.1,2.375) 16(3.1,3.325)
  silkscreen extent -3.22,-4.5 1.85,4.5, body extent -2.25,-4.5 2.25,4.5, height 2.35
BUSES [mm]
  round 1 hole 0.75: 1(0,0) 2(0,-2) 3(0,-4) 4(0,-6) 5(0,-8) 6(0,-10) 7(0,-12) 8(0,-14) 9(0,-16) 10(0,-18) 11(0,-20) 12(0,-22) 13(0,-24) 14(0,-26) 15(0,-28) 16(0,-30) 17(0,-32) 18(0,-34) 19(0,-36) 20(0,-38) 21(0,-40) 22(0,-42) 23(0,-44) 24(0,-46)
"Capacitor 0805" [mm]
  rect 1.25x2 smd: 1(-1.5,0) 2(1.5,0)
  silkscreen extent -0.1,-1 0.1,1, body extent -1.75,-0.65 1.75,0.65, height 0.6
Connector [mm]
  round 1 hole 0.75: 1(0,0) 2(0,-2) 3(0,-4) 4(0,-6) 5(0,-8) 6(0,-10) 7(0,-12) 8(0,-14)
"D FF" [mm]
  oval 1.5x0.8 smd: 1(-3.1,1.425) 2(-3.1,0.475) 3(-3.1,-0.475) 4(-3.1,-1.425) 5(3.1,-1.425) 6(3.1,-0.475) 7(3.1,0.475) 8(3.1,1.425)
  silkscreen extent -3.22,-2.5 1.85,2.5, body extent -2.25,-2.5 2.25,2.5, height 2.35
DF14A [mm]
  round 1 hole 0.75: 1(0,0) 2(0,2) 3(0,4) 4(0,6) 5(0,8) 6(0,10) 7(0,12) 8(0,14) 9(0,16) 10(0,18) 11(0,20) 12(0,22) 13(0,24) 14(0,26) 15(0,28) 16(0,30) 17(0,32) 18(0,34) 19(0,36) 20(0,38)
Diode [mm]
  rect 1.95x2.25 smd: 1(-2.025,0) 2(2.025,0)
  silkscreen extent -3.07,-2 2.3,2, body extent -2.3,-1.97 2.3,1.97, height 1.1
"DVI Connector" [mm]
  round 1 hole 0.75: 1(0,0) 2(0,-2) 3(0,-4) 4(0,-6) 5(0,-8) 6(0,-10) 7(0,-12) 8(0,-14) 9(0,-16) 10(0,-18) 11(0,-20) 12(0,-22) 13(0,-24) 14(0,-26) 15(0,-28) 16(0,-30) 17(0,-32) 18(0,-34) 19(0,-36) 20(0,-38) 21(0,-40) 22(0,-42) 23(0,-44) 24(0,-46) 25(0,-48) 26(0,-50) 27(0,-52) 28(0,-54) 29(0,-56) 30(0,-58) 31(0,-60) 32(0,-62)
GENERATOR-25MHZ [mm]
  oval 1.6x1 smd: 1(-3.15,0.635) 2(-3.15,-0.635) 3(3.15,-0.635) 4(3.15,0.635)
  silkscreen extent -3.27,-2 1.95,2, body extent -2,-2 2,2, height 2.65
IC102 [mm]
  oval 1.9x1 smd: 1(-4.75,1.905) 2(-4.75,0.635) 3(-4.75,-0.635) 4(-4.75,-1.905) 5(4.75,-1.905) 6(4.75,-0.635) 7(4.75,0.635) 8(4.75,1.905)
  silkscreen extent -4.87,-2.75 3.4,3.08, body extent -3.8,-2.75 3.8,2.75, height 2.65
IC103 [mm]
  rect 1x1 smd: 1(-1.2,0.95) 2(-1.2,0) 3(-1.2,-0.95) 4(1.2,-0.95) 5(1.2,0.95)
  silkscreen extent -1.32,-1.5 0.3,2.13, body extent -0.7,-1.5 0.7,1.5, height 1.1
"Inductor 2520" [mm]
  rect 1x2 smd: 1(-1.15,0) 2(1.15,0)
  silkscreen extent -1.91,-1 0.1,1.26, body extent -1.3,-0.65 1.3,0.65, height 0.6
Inputs#1 [mm]
  round 1 hole 0.75: 1(0,0) 2(0,-2) 3(0,-4) 4(0,-6) 5(0,-8) 6(0,-10)
Inputs#2 [mm]
  round 1 hole 0.75: 1(0,0) 2(0,-2)
"Inputs 1" [mm]
  round 1 hole 0.75: 1(0,0) 2(0,-2) 3(0,-4) 4(0,-6) 5(0,-8) 6(0,-10)
"Inputs 2" [mm]
  round 1 hole 0.75: 1(0,0) 2(0,-2) 3(0,-4) 4(0,-6) 5(0,-8) 6(0,-10) 7(0,-12) 8(0,-14)
J101 [mm]
  round 1 hole 0.75: 1(0,0) 2(0,-2) 3(0,-4) 4(0,-6) 5(0,-8) 6(0,-10) 7(0,-12) 8(0,-14) 9(0,-16) 10(0,-18) 11(0,-20) 12(0,-22)
J102 [mm]
  round 1 hole 0.75: 1(0,0) 2(0,-2) 3(0,-4) 4(0,-6)
J601 [mm]
  round 1 hole 0.75: 1(0,0) 2(0,2) 3(0,4) 4(0,6) 5(0,8) 6(0,10) 7(0,12)
MIC39 [mm]
  rect 0.75x0.9 smd: 1(-1.075,1) 2(-1.075,-1) 3(1.075,0)
  silkscreen extent -1.2,-1.5 0.7,2.12, body extent -0.7,-1.5 0.7,1.5, height 1.1
MIC5205 [mm]
  rect 0.75x1 smd: 1(-1.075,1.3) 2(-1.075,0) 3(-1.075,-1.3) 4(1.075,-1.3) 5(1.075,1.3)
  silkscreen extent -1.2,-2 0.3,2.47, body extent -0.7,-2 0.7,2, height 1.1
NBuses [mm]
  round 1 hole 0.75: 1(0,0) 2(0,-2) 3(0,-4) 4(0,-6) 5(0,-8) 6(0,-10) 7(0,-12) 8(0,-14) 9(0,-16) 10(0,-18) 11(0,-20) 12(0,-22) 13(0,-24) 14(0,-26) 15(0,-28) 16(0,-30) 17(0,-32) 18(0,-34) 19(0,-36) 20(0,-38) 21(0,-40) 22(0,-42) 23(0,-44) 24(0,-46)
NT68 [mm]
  oval 0.95x3 smd: 1(0,8.15)
  oval 0.95x2.2 smd: 2(-1.27,8.55) 3(-2.54,8.55) 4(-3.81,8.55) 5(-5.08,8.55) 6(-6.35,8.55) 18(-6.35,-8.55) 19(-5.08,-8.55) 20(-3.81,-8.55) 21(-2.54,-8.55) 22(-1.27,-8.55) 23(0,-8.55) 24(1.27,-8.55) 25(2.54,-8.55) 26(3.81,-8.55) 27(5.08,-8.55) 28(6.35,-8.55) 40(6.35,8.55) 41(5.08,8.55) 42(3.81,8.55) 43(2.54,8.55) 44(1.27,8.55)
  oval 2.2x0.95 smd: 7(-8.55,6.35) 8(-8.55,5.08) 9(-8.55,3.81) 10(-8.55,2.54) 11(-8.55,1.27) 12(-8.55,0) 13(-8.55,-1.27) 14(-8.55,-2.54) 15(-8.55,-3.81) 16(-8.55,-5.08) 17(-8.55,-6.35) 29(8.55,-6.35) 30(8.55,-5.08) 31(8.55,-3.81) 32(8.55,-2.54) 33(8.55,-1.27) 34(8.55,0) 35(8.55,1.27) 36(8.55,2.54) 37(8.55,3.81) 38(8.55,5.08) 39(8.55,6.35)
  silkscreen extent -9.1,-9.1 9.1,10.32, body extent -9,-9 9,9, height 2.54
"ONE PIN" [mm]
  round 1 hole 0.75: 1(0,0)
Outputs#1 [mm]
  round 1 hole 0.75: 1(0,0) 2(0,-2) 3(0,-4) 4(0,-6) 5(0,-8) 6(0,-10) 7(0,-12) 8(0,-14) 9(0,-16) 10(0,-18) 11(0,-20) 12(0,-22) 13(0,-24) 14(0,-26)
Outputs#2 [mm]
  round 1 hole 0.75: 1(0,0) 2(0,-2) 3(0,-4) 4(0,-6) 5(0,-8) 6(0,-10) 7(0,-12) 8(0,-14)
"Outputs 1" [mm]
  round 1 hole 0.75: 1(0,0) 2(0,-2) 3(0,-4) 4(0,-6) 5(0,-8) 6(0,-10) 7(0,-12) 8(0,-14) 9(0,-16)
PQ05 [mm]
  rect 1x1 smd: 1(-1.2,1.5) 2(-1.2,0) 3(-1.2,-1.5) 4(1.2,-1.5) 5(1.2,1.5)
  silkscreen extent -1.32,-2.5 0.3,2.67, body extent -0.7,-2.5 0.7,2.5, height 1.1
QFP95P4500X4500X245-160N [mm] "QFP, 160-Leads, Body 40,00x40,00mm, Pitch 0,95mm, IPC Medium Density"
  oval 1.85x0.7 smd: 1(-21.975,18.525) 2(-21.975,17.575) 3(-21.975,16.625) 4(-21.975,15.675) 5(-21.975,14.725) 6(-21.975,13.775) 7(-21.975,12.825) 8(-21.975,11.875) 9(-21.975,10.925) 10(-21.975,9.975) 11(-21.975,9.025) 12(-21.975,8.075) 13(-21.975,7.125) 14(-21.975,6.175) 15(-21.975,5.225) 16(-21.975,4.275) 17(-21.975,3.325) 18(-21.975,2.375) 19(-21.975,1.425) 20(-21.975,0.475) 21(-21.975,-0.475) 22(-21.975,-1.425) 23(-21.975,-2.375) 24(-21.975,-3.325) 25(-21.975,-4.275) 26(-21.975,-5.225) 27(-21.975,-6.175) 28(-21.975,-7.125) 29(-21.975,-8.075) 30(-21.975,-9.025) 31(-21.975,-9.975) 32(-21.975,-10.925) 33(-21.975,-11.875) 34(-21.975,-12.825) 35(-21.975,-13.775) 36(-21.975,-14.725) 37(-21.975,-15.675) 38(-21.975,-16.625) 39(-21.975,-17.575) 40(-21.975,-18.525) 81(21.975,-18.525) 82(21.975,-17.575) 83(21.975,-16.625) 84(21.975,-15.675) 85(21.975,-14.725) 86(21.975,-13.775) 87(21.975,-12.825) 88(21.975,-11.875) 89(21.975,-10.925) 90(21.975,-9.975) 91(21.975,-9.025) 92(21.975,-8.075) 93(21.975,-7.125) 94(21.975,-6.175) 95(21.975,-5.225) 96(21.975,-4.275) 97(21.975,-3.325) 98(21.975,-2.375) 99(21.975,-1.425) 100(21.975,-0.475) 101(21.975,0.475) 102(21.975,1.425) 103(21.975,2.375) 104(21.975,3.325) 105(21.975,4.275) 106(21.975,5.225) 107(21.975,6.175) 108(21.975,7.125) 109(21.975,8.075) 110(21.975,9.025) 111(21.975,9.975) 112(21.975,10.925) 113(21.975,11.875) 114(21.975,12.825) 115(21.975,13.775) 116(21.975,14.725) 117(21.975,15.675) 118(21.975,16.625) 119(21.975,17.575) 120(21.975,18.525)
  oval 0.7x1.85 smd: 41(-18.525,-21.975) 42(-17.575,-21.975) 43(-16.625,-21.975) 44(-15.675,-21.975) 45(-14.725,-21.975) 46(-13.775,-21.975) 47(-12.825,-21.975) 48(-11.875,-21.975) 49(-10.925,-21.975) 50(-9.975,-21.975) 51(-9.025,-21.975) 52(-8.075,-21.975) 53(-7.125,-21.975) 54(-6.175,-21.975) 55(-5.225,-21.975) 56(-4.275,-21.975) 57(-3.325,-21.975) 58(-2.375,-21.975) 59(-1.425,-21.975) 60(-0.475,-21.975) 61(0.475,-21.975) 62(1.425,-21.975) 63(2.375,-21.975) 64(3.325,-21.975) 65(4.275,-21.975) 66(5.225,-21.975) 67(6.175,-21.975) 68(7.125,-21.975) 69(8.075,-21.975) 70(9.025,-21.975) 71(9.975,-21.975) 72(10.925,-21.975) 73(11.875,-21.975) 74(12.825,-21.975) 75(13.775,-21.975) 76(14.725,-21.975) 77(15.675,-21.975) 78(16.625,-21.975) 79(17.575,-21.975) 80(18.525,-21.975) 121(18.525,21.975) 122(17.575,21.975) 123(16.625,21.975) 124(15.675,21.975) 125(14.725,21.975) 126(13.775,21.975) 127(12.825,21.975) 128(11.875,21.975) 129(10.925,21.975) 130(9.975,21.975) 131(9.025,21.975) 132(8.075,21.975) 133(7.125,21.975) 134(6.175,21.975) 135(5.225,21.975) 136(4.275,21.975) 137(3.325,21.975) 138(2.375,21.975) 139(1.425,21.975) 140(0.475,21.975) 141(-0.475,21.975) 142(-1.425,21.975) 143(-2.375,21.975) 144(-3.325,21.975) 145(-4.275,21.975) 146(-5.225,21.975) 147(-6.175,21.975) 148(-7.125,21.975) 149(-8.075,21.975) 150(-9.025,21.975) 151(-9.975,21.975) 152(-10.925,21.975) 153(-11.875,21.975) 154(-12.825,21.975) 155(-13.775,21.975) 156(-14.725,21.975) 157(-15.675,21.975) 158(-16.625,21.975) 159(-17.575,21.975) 160(-18.525,21.975)
  silkscreen extent -22.1,-20.65 20.65,20.65, body extent -20,-20 20,20, height 2.45
"Resistor 1206" [mm]
  rect 1x1.6 smd: 1(-1.5,0) 2(1.5,0)
  silkscreen extent -0.1,-0.75 0.1,0.75, body extent -1.7,-0.6 1.7,0.6, height 0.6
THC63 [mm]
  oval 1.5x0.8 smd: 1(-3.1,12.825) 2(-3.1,11.875) 3(-3.1,10.925) 4(-3.1,9.975) 5(-3.1,9.025) 6(-3.1,8.075) 7(-3.1,7.125) 8(-3.1,6.175) 9(-3.1,5.225) 10(-3.1,4.275) 11(-3.1,3.325) 12(-3.1,2.375) 13(-3.1,1.425) 14(-3.1,0.475) 15(-3.1,-0.475) 16(-3.1,-1.425) 17(-3.1,-2.375) 18(-3.1,-3.325) 19(-3.1,-4.275) 20(-3.1,-5.225) 21(-3.1,-6.175) 22(-3.1,-7.125) 23(-3.1,-8.075) 24(-3.1,-9.025) 25(-3.1,-9.975) 26(-3.1,-10.925) 27(-3.1,-11.875) 28(-3.1,-12.825) 29(3.1,-12.825) 30(3.1,-11.875) 31(3.1,-10.925) 32(3.1,-9.975) 33(3.1,-9.025) 34(3.1,-8.075) 35(3.1,-7.125) 36(3.1,-6.175) 37(3.1,-5.225) 38(3.1,-4.275) 39(3.1,-3.325) 40(3.1,-2.375) 41(3.1,-1.425) 42(3.1,-0.475) 43(3.1,0.475) 44(3.1,1.425) 45(3.1,2.375) 46(3.1,3.325) 47(3.1,4.275) 48(3.1,5.225) 49(3.1,6.175) 50(3.1,7.125) 51(3.1,8.075) 52(3.1,9.025) 53(3.1,9.975) 54(3.1,10.925) 55(3.1,11.875) 56(3.1,12.825)
  silkscreen extent -3.22,-14 1.85,14, body extent -2.25,-14 2.25,14, height 2.35
TR [mm]
  oval 1.6x1 smd: 1(-3.15,0.635) 2(-3.15,-0.635) 3(3.15,-0.635) 4(3.15,0.635)
  silkscreen extent -3.27,-2 1.95,2, body extent -2,-2 2,2, height 2.65
"Transistor 1" [mm]
  rect 1x1 smd: 1(-1.2,0.95) 2(-1.2,-0.95) 3(1.2,0)
  silkscreen extent -1.32,-1.5 0.7,2.12, body extent -0.7,-1.5 0.7,1.5, height 1.1
"VGA Connector" [mm]
  round 1 hole 0.75: 1(0,0) 2(0,-4) 3(0,-8) 4(0,-12) 5(0,-16) 6(0,-20) 7(0,-24) 8(0,-28) 9(0,-2) 10(0,-6) 11(0,-10) 12(0,-14) 13(0,-18) 14(0,-22) 15(0,-26) 16(0,2) 17(0,4)